# EAGLE board Janus v1 (EAGLE 7.4.0)
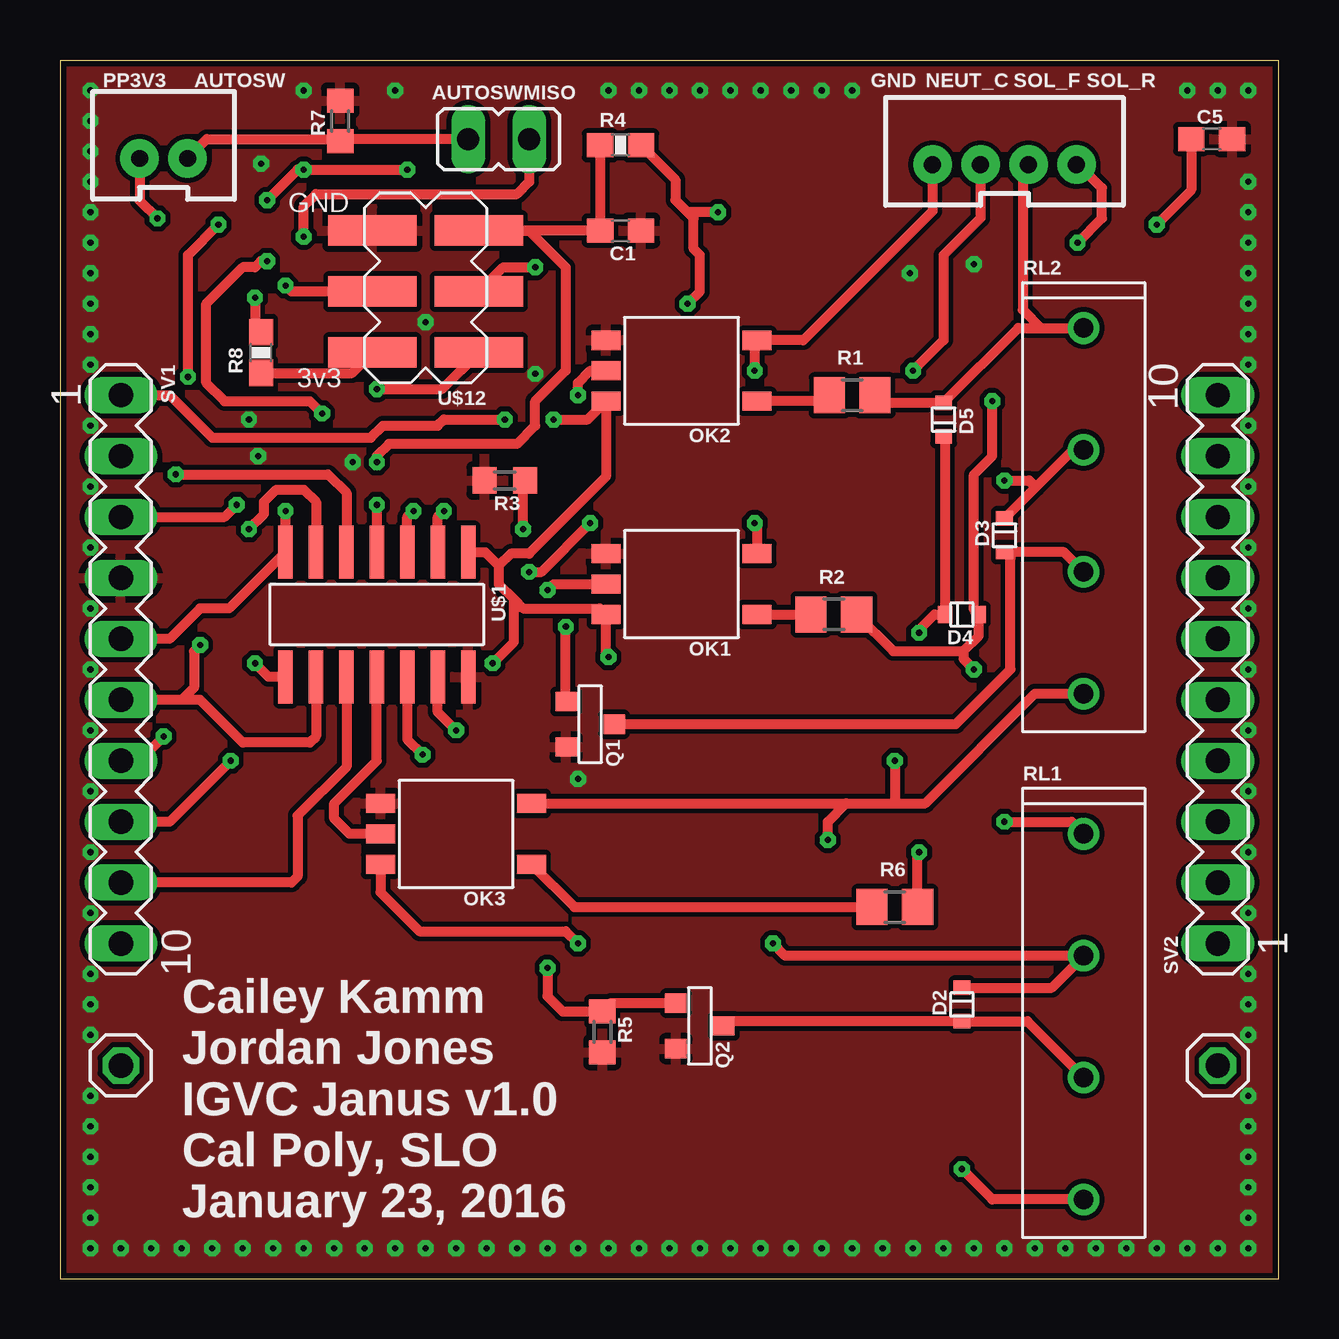
[diagram p0: board, top side]
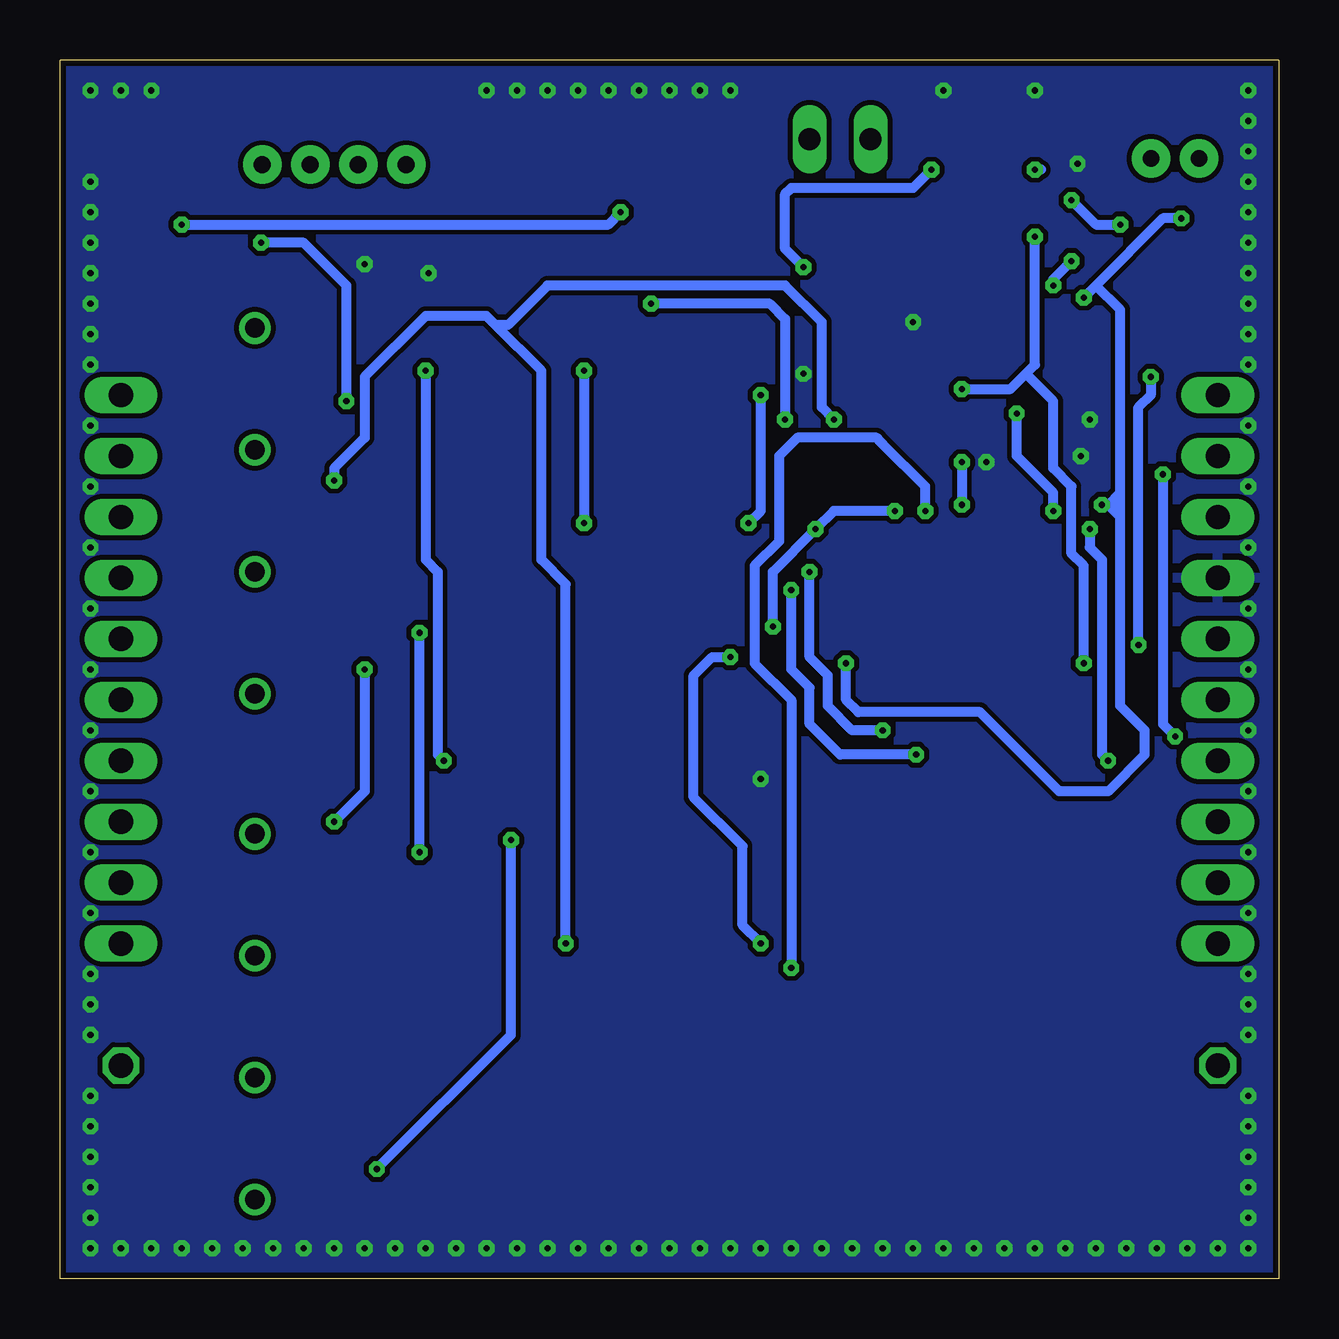
[diagram p1: board, bottom side, seen from below]

Size 50.8 x 50.8 mm. Coordinates in mm from the lower left corner, seen from the top.
Outline: 0,0 50.8,0 50.8,50.8 0,50.8 0,0
Copper layers (1*16): Top 0.035mm / dielectric 1.5mm / Bottom 0.035mm
Design rules "default *": minimum track width 10mil, minimum drill 10mil, track to track 8mil, track to pad 8mil, pad to pad 8mil, via to via 8mil, smd to smd 8mil, copper to edge 10mil, drill to drill 8mil, minimum pad ring 10mil, minimum via ring 8mil, stop-mask expansion 4mil, vias tented up to drill 0mil, thermal gap 10mil

## Footprints (pad centres in the part's own frame; a part is rotated, then mirrored left to right if it is on the bottom)
C0603 = smd 1.1 x 1: 1 -0.85,0; 2 0.85,0
SOD523_SC79 = smd 0.6 x 0.7: P$1 -0.7,0; P$2 0.7,0
JST-2-PTH-VERT = drill 0.7 pad 1.6: 1 -1,-0.55; 2 1,-0.55
JST-4-PTH-VERT = drill 0.7 pad 1.6: 1 -3,-0.55; 2 -1,-0.55; 3 1,-0.55; 4 3,-0.55
JP1 = drill 0.914 long: 1 0,-1.27; 2 0,1.27
1X01 = drill 1.016 octagon: 1 0,0
SOIC-6-5 = smd 1.2 x 0.8: P$1 -3.15,1.27; P$3 -3.15,-1.27; P$4 3.15,-1.27; P$5 3.15,0; P$6 3.15,1.27
SOT-23-3 = smd 0.8 x 0.9: P$1 -0.95,-1; P$2 0.95,-1; P$3 0,1
R0805 = smd 1.3 x 1.5: 1 -0.95,0; 2 0.95,0
R0603 = smd 1 x 1.1: 1 -0.85,0; 2 0.85,0
0603-RES = smd 1.1 x 1: 1 -0.85,0; 2 0.85,0
RELAY9007 = drill 0.813: P$1 0,5.08; P$2 0,0; P$3 0,-5.08; P$4 0,-10.16
MA10-1 = drill 1.016 long: 1 -11.43,0; 2 -8.89,0; 3 -6.35,0; 4 -3.81,0; 5 -1.27,0; 6 1.27,0; 7 3.81,0; 8 6.35,0; 9 8.89,0; 10 11.43,0
SOIC-14 = smd 2.2 x 0.6: P$1 -2.6,5.08; P$2 -2.6,3.81; P$3 -2.6,2.54; P$4 -2.6,1.27; P$5 -2.6,0; P$6 -2.6,-1.27; P$7 -2.6,-2.54; P$8 2.6,-2.54; P$9 2.6,-1.27; P$10 2.6,0; P$11 2.6,1.27; P$12 2.6,2.54; P$13 2.6,3.81; P$14 2.6,5.08
3X2SMD = smd 3.68 x 1.27: P$1 -2.22,2.54; P$2 -2.22,0; P$3 -2.22,-2.54; P$4 2.22,-2.54; P$5 2.22,0; P$6 2.22,2.54

## Placement (x,y rotation side)
C1  .1uF  [C0603]  23.37,43.69 180 top
C5  .1uF  [C0603]  48.01,47.5 0 top
D2  1N4148X-TP  [SOD523_SC79]  37.59,11.43 90 top
D3  1N4148X-TP  [SOD523_SC79]  39.37,30.99 90 top
D4  1N4148X-TP  [SOD523_SC79]  37.59,27.69 180 top
D5  1N4148X-TP  [SOD523_SC79]  36.83,35.81 270 top
J1  2X1JST  [JST-2-PTH-VERT]  4.32,47.24 0 top
J2  4X1JST  [JST-4-PTH-VERT]  39.37,46.99 0 top
JP1  [JP1]  18.29,47.5 270 top
JP2  [1X01]  2.54,8.89 0 top
JP3  [1X01]  48.26,8.89 0 top
OK1  TLP2361  [SOIC-6-5]  25.91,28.96 180 top
OK2  TLP2361  [SOIC-6-5]  25.91,37.85 180 top
OK3  TLP2361  [SOIC-6-5]  16.51,18.54 180 top
Q1  DMN6140L-7  [SOT-23-3]  22.1,23.11 270 top
Q2  DMN6140L-7  [SOT-23-3]  26.67,10.54 270 top
R1  4.7k  [R0805]  33.02,36.83 0 top
R2  4.7k  [R0805]  32.26,27.69 0 top
R3  10k  [R0603]  18.54,33.27 180 top
R4  5.1k  [0603-RES]  23.37,47.24 0 top
R5  10k  [R0603]  22.61,10.29 270 top
R6  4.7k  [R0805]  34.8,15.49 0 top
R7  10k  [R0603]  11.68,48.26 90 top
R8  0  [0603-RES]  8.38,38.61 90 top
RL1  9007-12-00  [RELAY9007]  42.67,13.46 0 top
RL2  9007-12-00  [RELAY9007]  42.67,34.54 0 top
SV1  [MA10-1]  2.54,25.4 270 top
SV2  [MA10-1]  48.26,25.4 90 top
U$1  ATTINY84  [SOIC-14]  11.94,27.69 270 top
U$12  3V3ISP  [3X2SMD]  15.24,41.15 180 top

## Library data of the parts
C1 C5 R1-R3 R5-R7 = resistor
D2-D5 = CP-Discrete; DIGIKEYPART: 1N4148XTPMSCT-ND
J1 = CP-Connectors; DIGIKEYPART: 455-1704-ND
J2 = CP-Connectors; DIGIKEYPART: 455-1706-ND
JP1 = jumper
JP2 JP3 = pinhead
OK1-OK3 = CP-Discrete; DIGIKEYPART: TLP2361(TPLECT-ND
Q1 Q2 = CP-Discrete; DIGIKEYPART: DMN6140L-7DICT-ND
R4 R8 = SparkFun-Resistors
RL1 RL2 = CP-EletroMech; COILVOLTAGE: 12v; CURRENT: .5A; DIGIKEYPART: 306-1064-ND
SV1 SV2 = con-lstb; OC_FARNELL: unknown; OC_NEWARK: unknown
U$1 = CP-IC; DIGIKEYPART: ATTINY84A-SSU-ND
U$12 = CP-Connectors; DIGIKEYPART: WM17457-ND

## Nets
ATTINY_RES: C1.2 R4.1 U$1.P$4 U$12.P$3
AUTOSW: J1.2 JP1.1 R7.1
FOK_R: OK2.P$1 R1.1
FOR_CTRL: Q1.P$1 R3.1 U$1.P$2
FOR_SEN: OK2.P$5 U$1.P$13
FRL_L: D3.P$1 Q1.P$3 RL2.P$3
GND: C1.1 C5.2 OK1.P$4 OK2.P$4 OK3.P$4 Q1.P$2 Q2.P$2 R3.2 R5.2 R7.2 SV1.4 U$1.P$14 U$12.P$4
GND_1: J2.1 OK1.P$3 OK2.P$3
MCU_DRIVE_EN: SV1.9 U$1.P$10
MCU_FOR: SV1.7 U$1.P$5
MCU_REV: SV1.8 U$1.P$6
MISO: JP1.2 U$1.P$8 U$12.P$1
N$1: R8.1 U$12.P$6
NEUT_C: J2.2 OK3.P$3 RL1.P$4 RL2.P$4
NEUTRAL_N: OK3.P$5 U$1.P$11
NOK_R: OK3.P$1 R6.1
NPWR: D4.P$2 D5.P$2 R6.2
PP3V3: C5.1 J1.1 OK1.P$6 OK2.P$6 OK3.P$6 R4.2 R8.2 SV1.3 U$1.P$1
PP5V: SV1.2
PP12V: D2.P$2 D3.P$2 RL1.P$2 RL2.P$2 SV1.1
REV_CTRL: Q2.P$1 R5.1 U$1.P$3
REV_SEN: OK1.P$5 U$1.P$12
ROK_R: OK1.P$1 R2.1
RRL_L: D2.P$1 Q2.P$3 RL1.P$3
SCL: SV1.6 U$1.P$9 U$12.P$2
SDA: SV1.5 U$1.P$7 U$12.P$5
SOL_F: D5.P$1 J2.3 R1.2 RL2.P$1
SOL_R: D4.P$1 J2.4 R2.2 RL1.P$1

## Tracks (layer width: path | path; a pad name or v marks a point on that pad's centre or on a via)
ATTINY_RES  (via drill 0.25)
  Top 0.406: R4.1 C1.2 U$12.P$3 19.56,43.69 21.08,42.16 21.08,37.85 19.81,36.58 19.81,35.56 19.05,34.8 13.72,34.8 13.21,34.29 v13.21,34.04 | v13.21,32.26 U$1.P$4
  Bottom 0.406: v13.21,34.04 v13.21,32.26
AUTOSW
  Top 0.406: J1.2 6.12,47.5 11.6,47.5 R7.1 11.77,47.5 JP1.1
FOK_R
  Top 0.406: R1.1 31.82,36.58 OK2.P$1
FOR_CTRL  (via drill 0.25)
  Top 0.406: Q1.P$1 21.08,24.08 v21.08,27.18 | v19.3,31.24 19.3,33.19 R3.1 | U$1.P$2 15.75,31.75 v16,32
  Bottom 0.406: v21.08,27.18 21.08,29.46 v19.3,31.24 18.54,32 v16,32
FOR_SEN  (via drill 0.25)
  Top 0.406: v16.51,22.86 15.75,23.62 U$1.P$13 | OK2.P$5 22.1,37.85 21.59,37.34 v21.59,36.83 | v19.56,29.46 20.07,29.46 v22.1,31.5
  Bottom 0.406: v16.51,22.86 17.78,22.86 18.8,23.88 18.8,25.15 19.56,25.91 v19.56,29.46 | v22.1,31.5 21.59,32 v21.59,36.83
FRL_L
  Top 0.406: RL2.P$3 41.85,30.29 D3.P$1 39.62,30.03 39.62,25.4 37.34,23.11 Q1.P$3
GND  (via drill 0.25)
  other vias: 8.38,46.48 12.19,34.04 15.24,39.88 35.43,41.91 38.1,42.29 1.27,35.56 1.27,38.1 1.27,39.37 1.27,40.64 1.27,41.91 1.27,43.18 1.27,44.45 1.27,45.72 1.27,46.99 1.27,48.26 1.27,49.53 10.16,49.53 13.97,49.53 22.86,49.53 24.13,49.53 25.4,49.53 26.67,49.53 27.94,49.53 29.21,49.53 30.48,49.53 31.75,49.53 33.02,49.53 46.99,49.53 48.26,49.53 49.53,49.53 49.53,45.72 49.53,44.45 49.53,43.18 49.53,41.91 49.53,40.64 49.53,39.37 49.53,38.1 49.53,35.56 49.53,33.02 49.53,30.48 49.53,27.94 49.53,25.4 49.53,22.86 49.53,20.32 49.53,17.78 49.53,15.24 49.53,12.7 49.53,11.43 49.53,10.16 49.53,7.62 49.53,6.35 49.53,5.08 49.53,3.81 49.53,2.54 49.53,1.27 48.26,1.27 46.99,1.27 45.72,1.27 43.18,1.27 44.45,1.27 41.91,1.27 40.64,1.27 39.37,1.27 38.1,1.27 36.83,1.27 35.56,1.27 34.29,1.27 33.02,1.27 31.75,1.27 26.67,1.27 29.21,1.27 27.94,1.27 30.48,1.27 25.4,1.27 24.13,1.27 22.86,1.27 21.59,1.27 20.32,1.27 13.97,1.27 15.24,1.27 16.51,1.27 17.78,1.27 19.05,1.27 10.16,1.27 11.43,1.27 12.7,1.27 1.27,1.27 2.54,1.27 3.81,1.27 5.08,1.27 6.35,1.27 7.62,1.27 8.89,1.27 1.27,2.54 1.27,3.81 1.27,5.08 1.27,6.35 1.27,7.62 1.27,10.16 1.27,11.43 1.27,12.7 1.27,15.24 1.27,17.78 1.27,20.32 1.27,22.86 1.27,25.4 1.27,27.94 1.27,30.48 1.27,33.02 21.59,20.83 7.87,35.81 19.81,37.72 8.26,34.29
  pour Bottom: 0,50.8 50.8,50.8 50.8,0 0,0
  pour Top: 50.8,50.8 0,50.8 0,0 50.8,0
GND_1  (via drill 0.25)
  Top 0.406: J2.1 36.37,44.5 30.99,39.12 OK2.P$3 28.96,39.01 v28.96,37.85 | v28.96,31.5 29.06,31.39 OK1.P$3
  Bottom 0.406: v28.96,37.85 v28.96,31.5
MCU_DRIVE_EN
  Top 0.406: U$1.P$10 11.94,21.34 9.91,19.3 9.91,16.76 9.65,16.51 SV1.9
MCU_FOR  (via drill 0.25)
  Top 0.406: v4.32,22.61 3.3,21.59 SV1.7 | v4.83,33.53 11.18,33.53 11.94,32.77 U$1.P$5
  Bottom 0.406: v4.83,33.53 4.83,23.11 v4.32,22.61
MCU_REV  (via drill 0.25)
  Top 0.406: v7.11,21.59 4.57,19.05 SV1.8 | v7.87,31.24 8.51,31.88 8.51,32.38 9.02,32.89 10.16,32.89 10.67,32.38 U$1.P$6
  Bottom 0.406: v7.87,31.24 7.87,30.48 7.37,29.97 7.37,21.84 v7.11,21.59
MISO  (via drill 0.25)
  Top 0.406: JP1.2 19.56,45.72 19.05,45.21 10.67,45.21 10.16,44.7 v10.16,43.43 | U$1.P$8 8.7,25.09 v8.13,25.65 | v13.21,37.08 15.94,37.08 U$12.P$1
  Bottom 0.406: v13.21,37.08 11.18,37.08 10.54,37.72 | 10.54,37.72 10.16,38.1 v10.16,43.43 | 10.54,37.72 9.4,36.58 9.4,33.78 8.64,33.02 8.64,30.23 8.13,29.72 v8.13,25.65
N$1
  Top 0.406: R8.1 12.17,37.76 U$12.P$6
NEUT_C  (via drill 0.25)
  Top 0.406: OK3.P$3 32.77,19.81 | 32.77,19.81 34.8,19.81 | 34.8,19.81 36.07,19.81 40.64,24.38 RL2.P$4 | RL1.P$4 38.86,3.3 v37.59,4.57 | J2.2 38.37,44.21 36.83,42.67 36.83,39.12 v35.56,37.85 | v34.8,21.59 34.8,19.81 | v32,18.29 32,19.05 32.77,19.81
  Bottom 0.406: v37.59,4.57 32,10.16 v32,18.29 | v35.56,37.85 35.56,29.97 35.05,29.46 35.05,21.84 v34.8,21.59
NEUTRAL_N
  Top 0.406: OK3.P$5 12.06,18.54 11.43,19.18 11.43,19.81 13.21,21.59 U$1.P$11
NOK_R
  Top 0.406: OK3.P$1 21.44,15.49 R6.1
NPWR  (via drill 0.25)
  Top 0.406: D5.P$2 36.89,35.05 D4.P$2 36.45,27.69 35.81,27.05 v35.81,26.92 | R6.2 35.75,17.71 v35.81,17.78
  Bottom 0.406: v35.81,17.78 v35.81,26.92
PP3V3  (via drill 0.25)
  Top 0.406: J1.1 3.32,44.94 v4.06,44.2 | v8.13,40.89 8.13,39.71 R8.2 | OK3.P$6 13.36,16.1 14.99,14.48 21.08,14.48 v21.59,13.97 | v22.86,25.91 22.76,26.01 OK1.P$6 22.5,27.94 19.3,27.94 18.92,28.32 | U$1.P$1 17.72,30.29 18.29,29.72 | 18.29,29.72 18.29,28.96 18.92,28.32 | 18.29,29.72 18.8,30.23 19.56,30.23 22.76,33.43 OK2.P$6 22,35.81 v20.57,35.81 | R4.2 25.65,45.81 25.65,44.96 26.16,44.45 | v18.03,25.65 18.92,26.54 18.92,28.32 | C5.1 47.16,45.38 v45.72,43.94 | v27.43,44.45 26.16,44.45 | 26.16,44.45 26.42,44.2 26.42,42.93 26.67,42.67 26.67,41.15 v26.16,40.64 | SV1.3 6.86,31.75 v7.37,32.26
  Bottom 0.406: v4.06,44.2 4.83,44.2 7.62,41.4 | 7.62,41.4 v8.13,40.89 | v21.59,13.97 22.35,14.73 22.35,18.03 24.38,20.07 24.38,25.15 23.62,25.91 v22.86,25.91 | v18.03,25.65 18.03,24.13 17.53,23.62 12.45,23.62 9.14,20.32 7.11,20.32 5.59,21.84 5.59,22.86 6.6,23.88 6.6,31.75 | v45.72,43.94 27.94,43.94 v27.43,44.45 | 6.6,31.75 6.6,32.38 | 6.6,32.38 6.6,32.51 | 6.6,32.51 6.6,32.77 | 6.6,32.77 6.6,40.39 7.62,41.4 | v26.16,40.64 21.21,40.64 20.57,40.01 v20.57,35.81 | 6.73,32.26 6.6,32.38 | 6.86,32.26 6.6,32.51 | 7.11,32.26 6.6,31.75 | v7.37,32.26 7.11,32.26 | 7.11,32.26 6.6,32.77
PP12V  (via drill 0.25)
  Top 0.406: D2.P$2 41.34,12.13 RL1.P$2 | D3.P$2 40.67,32.99 | 40.67,32.99 42.23,34.54 RL2.P$2 | RL1.P$2 42.93,13.46 | RL1.P$2 30.23,13.46 v29.72,13.97 | v39.37,33.27 40.39,33.27 40.67,32.99 | v18.54,35.81 16,35.81 15.75,35.56 13.46,35.56 12.95,35.05 6.35,35.05 4.57,36.83 SV1.1
  Bottom 0.406: v29.72,13.97 29.72,28.96 30.73,29.97 30.73,37.85 32.64,39.75 | 32.64,39.75 33.02,40.13 35.56,40.13 38.1,37.59 38.1,35.05 39.37,33.78 v39.37,33.27 | v18.54,35.81 19.05,36.32 19.05,39.88 20.57,41.4 30.48,41.4 32.13,39.75 32.64,39.75
REV_CTRL  (via drill 0.25)
  Top 0.406: U$1.P$3 14.48,31.75 v14.73,32 | Q2.P$1 22.96,11.49 R5.1 20.95,11.14 20.32,11.77 v20.32,12.95
  Bottom 0.406: v20.32,12.95 20.32,24.13 21.84,25.65 21.84,29.72 20.83,30.73 20.83,34.29 20.07,35.05 16.76,35.05 16.57,34.86 16.51,34.8 14.73,33.02 v14.73,32
REV_SEN  (via drill 0.25)
  Top 0.406: U$1.P$12 14.48,22.48 v15.11,21.84 | v20.32,28.7 20.57,28.96 OK1.P$5
  Bottom 0.406: v15.11,21.84 18.29,21.84 19.56,23.11 19.56,24.64 20.32,25.4 v20.32,28.7
ROK_R
  Top 0.406: OK1.P$1 R2.1
RRL_L
  Top 0.406: RL1.P$3 40.32,10.73 D2.P$1 27.86,10.73 Q2.P$3
SCL  (via drill 0.25)
  Top 0.406: U$1.P$9 10.67,22.61 10.41,22.35 7.62,22.35 5.84,24.13 5.33,24.13 | 5.33,24.13 SV1.6 | U$12.P$2 18.48,42.16 v19.81,42.16 | v6.6,43.94 5.33,42.67 v5.33,37.59 | 5.33,24.13 5.21,24.26 5.59,24.64 5.59,26.16 v5.84,26.42 | v14.48,46.23 v10.16,46.23 9.91,46.23 v8.64,44.96
  Bottom 0.406: v19.81,42.16 20.57,42.93 20.57,45.21 20.32,45.47 15.24,45.47 v14.48,46.23 | v6.6,43.94 7.62,43.94 v8.64,44.96 | v5.84,26.42 5.84,36.32 5.33,36.83 v5.33,37.59 | 9.91,46.23 v10.16,46.23
SDA  (via drill 0.25)
  Top 0.406: v9.4,32 U$1.P$7 7.05,27.94 5.84,27.94 4.57,26.67 SV1.5 | v10.92,36.07 10.41,36.58 6.86,36.58 6.1,37.34 6.1,40.64 7.62,42.16 8.13,42.16 8.38,42.42 v8.64,42.42 | U$12.P$5 9.65,41.15 v9.4,41.4
  Bottom 0.406: v9.4,32 9.4,32.77 10.92,34.29 v10.92,36.07 | v9.4,41.4 9.4,41.66 v8.64,42.42
SOL_F
  Top 0.406: R1.2 34.29,36.51 D5.P$1 39.94,39.62 40.89,39.62 | 40.89,39.62 RL2.P$1 | J2.3 arc90 40.13,46.2 40.13,40.39 40.89,39.62
SOL_R  (via drill 0.25)
  Top 0.406: R2.2 34.73,26.16 37.66,26.16 | 37.66,26.16 38.29,26.8 D4.P$1 38.1,27.88 38.1,33.53 38.86,34.29 v38.86,36.58 | 37.66,26.16 37.66,25.84 v38.1,25.4 | v39.37,19.05 42.16,19.05 RL1.P$1 | v42.42,43.18 43.43,44.2 43.43,45.47 42.46,46.44 J2.4
  Bottom 0.406: v38.1,25.4 38.1,20.32 v39.37,19.05 | v42.42,43.18 40.64,43.18 38.86,41.4 v38.86,36.58

## Text on the board
tPlace: PP3V3 | AUTOSW | GND | NEUT_C | SOL_F | SOL_R | AUTOSW | MISO | Cailey Kamm / Jordan Jones / IGVC Janus v1.0 / Cal Poly, SLO / January 23, 2016